# Altium PCB Dionysus.PcbDoc (part 1 of 2)
Units mil, origin at the board's own origin, x right, y up, seen from the top; angles counter-clockwise.
Board outline 4100 x 2100 mil, 4 copper layers (Component Side, Ground Plane, Power Plane, Solder Side); 123 components, 141 nets, 602 pads, 292 vias.
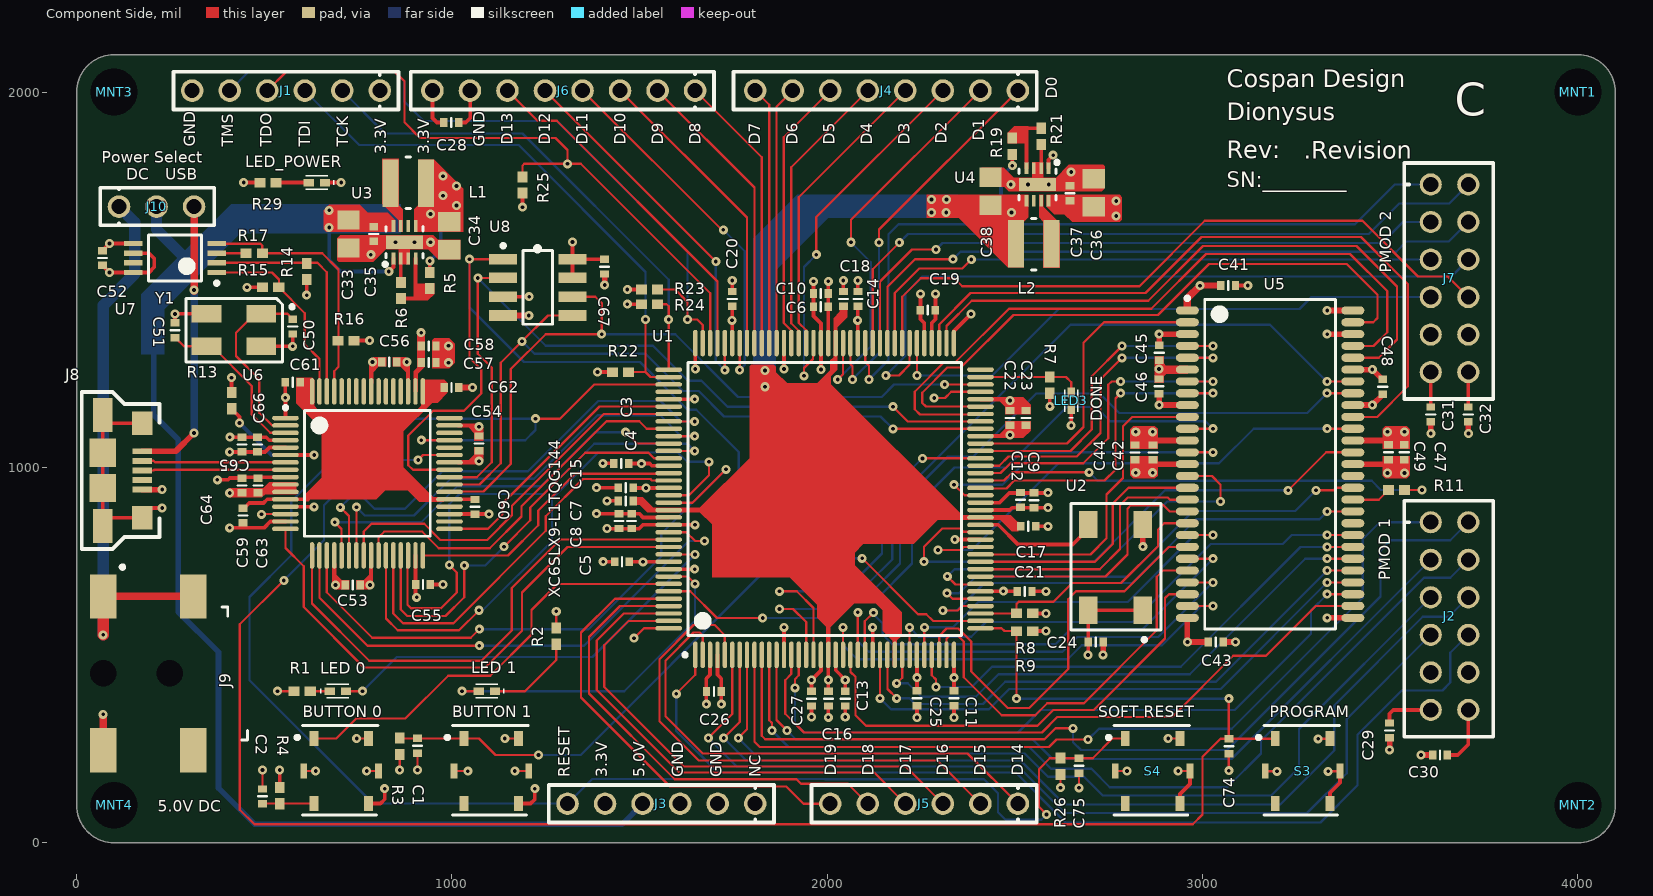
[diagram p0: Component Side view]
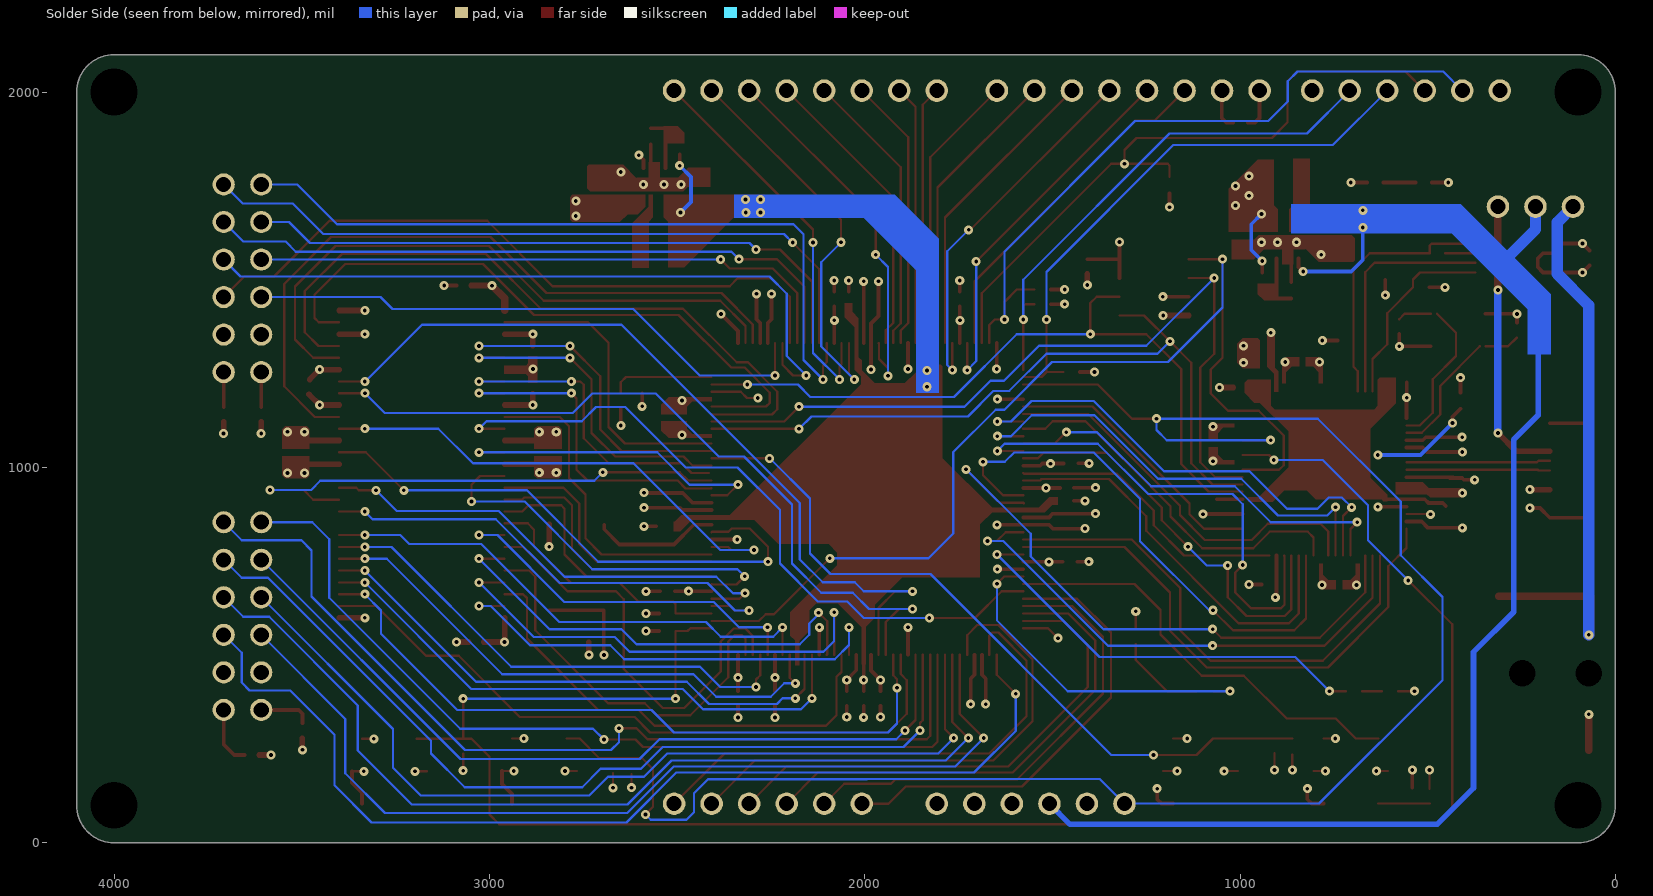
[diagram p1: Solder Side view, seen from below]
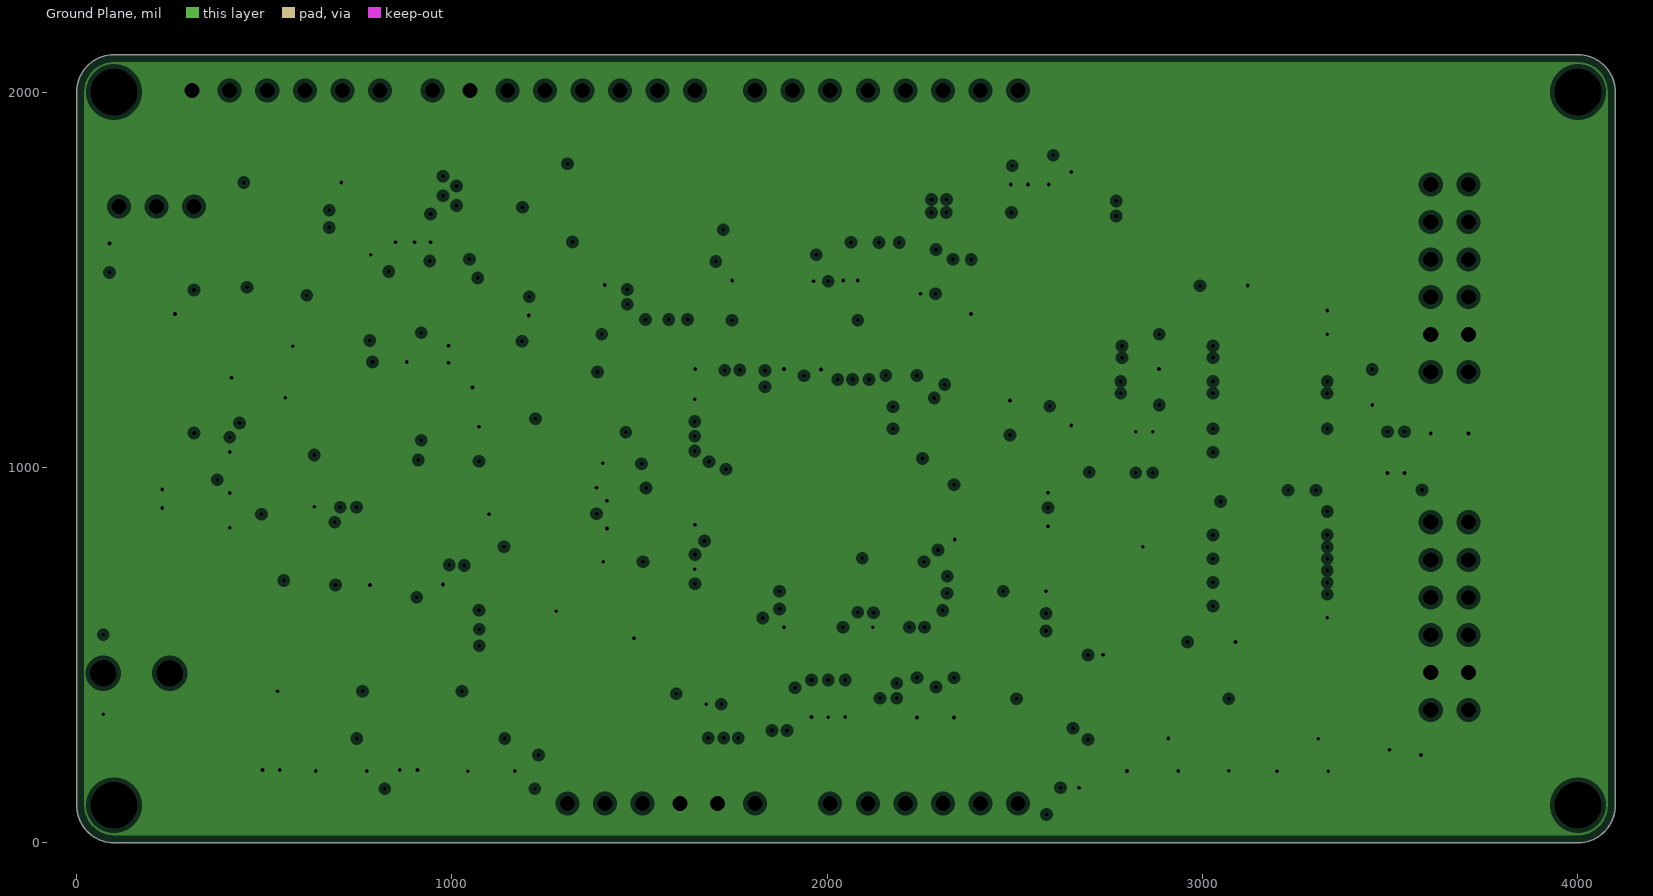
[diagram p2: Ground Plane, clearances drawn from the general rule]
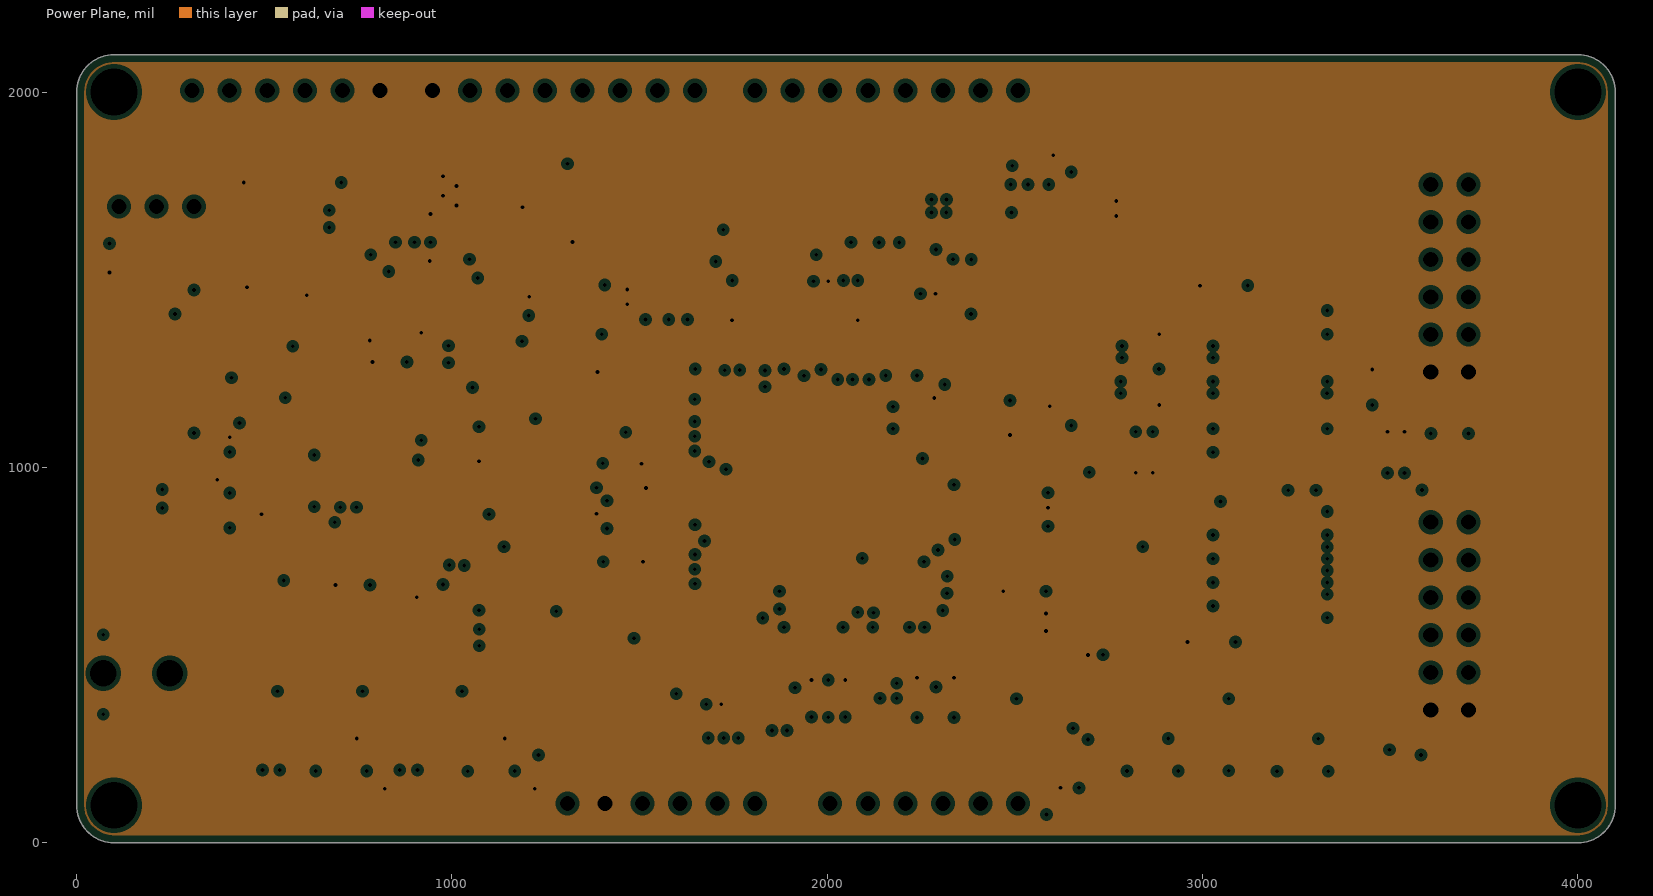
[diagram p3: Power Plane, clearances drawn from the general rule]

## Layer stack, top to bottom
Top Solder: solder mask 0.4, Solder Resist, Dk 3.5
Component Side: signal copper 1.4
Dielectric1: core 12.6, FR-4, Dk 4.8
Ground Plane: plane copper 1.4
Dielectric2: prepreg 12.6, FR-4, Dk 4.8
Power Plane: plane copper 1.4
Dielectric3: core 12.6, FR-4, Dk 4.8
Solder Side: signal copper 1.4
Bottom Solder: solder mask 0.4, Solder Resist, Dk 3.5

## Board outline
0,100 0,2000 cw(c100,2000) 100,2100 4000,2100 cw(c4000,2000) 4100,2000 4100,100 cw(c4000,100) 4000,0 100,0 cw(c100,100)

## Design rules (kind name [scope] priority, off if disabled: settings)
Clearance "Clearance~Sunstone Circuits" [All] p1: gap=6 // Sunstone Circuits Minimum Clearance Rule (MLB~4&6 Layer Designs)
DiffPairsRouting [All] p1: maxlimit=10 minlimit=10 mostfreqgap=10 toplayer_minwidth=15 toplayer_maxwidth=15 toplayer_prefwidth=15 bottomlayer_minwidth=15 bottomlayer_maxwidth=15 bottomlayer_prefwidth=15 maxuncoupledlength=500
HoleSize "HoleSize~Sunstone Circuits" [All] p1: absolutevalues=TRUE maxlimit=251 minlimit=8 maxpercent=80.000 minpercent=20.000 // Sunstone Circuits Hole Size Rule (MLB~4&6 Layer Designs)
HoleSize Testpoint [All] p2: absolutevalues=TRUE maxlimit=100 minlimit=1 maxpercent=80.000 minpercent=20.000
HoleSize TestPointUsage [All] p3: absolutevalues=TRUE maxlimit=100 minlimit=1 maxpercent=80.000 minpercent=20.000
MinimumAnnularRing "MinimumAnnularRing~Sunstone Circuits" [All] p1: minimumring=7 // Sunstone Circuits Minimum Annular Ring (MLB~4&6 Layer Designs)
MinimumSolderMaskSliver [All] p1: minsoldermaskwidth=1
PlaneClearance "PlaneClearance~Sunstone Circuits" [All] p1: clearance=12 // Sunstone Circuits Power Plane Clearance Rule (MLB~4&6 Layer Designs)
PlaneConnect "PlaneConnect~Sunstone Circuits" [All] p1: planeconnectstyle=Relief reliefexpansion=10 reliefentries=4 reliefconductorwidth=8 reliefairgap=10 // Sunstone Circuits Power Plane Connect Rule (MLB~4&6 Layer Designs)
PolygonConnect "PolygonConnect~Sunstone Circuits" [All] p1: connectstyle=Relief reliefconductorwidth=8 reliefentries=4 polygonreliefangle="90 Angle" airgapwidth=10 // Sunstone Circuits Polygon Connect Style (MLB~4&6 Layer Designs)
RoutingVias "RoutingVias~Sunstone Circuits" [All] p1: holewidth=16 width=30 viastyle="Through Hole" minholewidth=8 minwidth=24 maxholewidth=20 maxwidth=40 // Sunstone Circuits Routing Vias Rule (MLB~4&6 Layer Designs)
ShortCircuit "ShortCircuit~Sunstone Circuits" [All] p1: allowed=FALSE // Sunstone Circuits Short Circuit Rule~Do Not Allow (MLB~4&6 Layer Designs)
SilkToSilkClearance [All] p1: silktosilkclearance=5
SilkToSolderMaskClearance SilkscreenOverComponentPads [IsPad] p1: minsilkscreentomaskgap=5 clearancetoexposedcopper=TRUE
SolderMaskExpansion "SolderMaskExpansion~Sunstone Circuits" [All] p1: expansion=3 // Sunstone Circuits Solder Mask Expansion Rule (MLB~4&6 Layer Designs)
ViasUnderSMD "ViasUnderSMD~Sunstone Circuits" [All] p1: allowed=FALSE // Sunstone Circuits Vias Under SMD~Do Not Allow (MLB~4&6 Layer Designs)
Width "Width~Sunstone Circuits" [All] p1: maxlimit=100 minlimit=6 preferedwidth=10 // Sunstone Circuits Minimum Width Rule (MLB~4&6 Layer Designs)
22 further rules are at their usual default settings.

## Classes and differential pairs
differential pair USB: +USB_P -USB_N

## Components (designator, comment, footprint, x,y, rotation, side; value= is the part's Value field where it differs from the comment)
"BUTTON 0" "S_TACTILE_5X5" TACTILE_BUTTON_5X5 705,191 r0 top
"BUTTON 1" "S_TACTILE_5X5" TACTILE_BUTTON_5X5 1105,191 r0 top
C1 "0.1uF" C_ERA-0402 908.35,258.31 r90 top
C2 "0.1uF" C_ERA-0402 495,123.69 r270 top
C3 "4.7uF" C_ERA-0402 1451.09,1010.91 r0 top
C4 "0.47uF" C_ERA-0402 1463,946 r0 top
C5 "0.47uF" C_ERA-0402 1453.32,748.68 r0 top
C6 "0.47uF" C_ERA-0402 1983.04,1428.04 r0 top
C7 "4.7uF" C_ERA-0402 1479,857 r90 top
C8 "4.7uF" C_ERA-0402 1445,857 r90 top
C9 "4.7uF" C_ERA-0402 2551,912.69 r270 top
C10 "4.7uF" C_ERA-0402 1983.04,1463.04 r0 top
C11 "4.7uF" C_ERA-0402 2337.49,385 r90 top
C12 "4.7uF" C_ERA-0402 2515,913.69 r270 top
C13 "4.7uF" C_ERA-0402 2048,384 r90 top
C14 "0.47uF" C_ERA-0402 2081.58,1449 r270 top
C15 "0.47uF" C_ERA-0402 1463,911 r0 top
C16 "4.7uF" C_ERA-0402 2003,384 r90 top
C17 "4.7uF" C_ERA-0402 2535.74,843.31 r180 top
C18 "4.7uF" C_ERA-0402 2043,1449 r270 top
C19 "0.47uF" C_ERA-0402 2268,1419 r0 top
C20 "4.7uF" C_ERA-0402 1746.94,1449 r270 top
C21 "0.47uF" C_ERA-0402 2526,669.94 r180 top
C22 "0.47uF" C_ERA-0402 2487,1132 r270 top
C23 "4.7uF" C_ERA-0402 2530,1132 r270 top
C24 "0.1uF" C_ERA-0402 2715.34,534.66 r180 top
C25 "0.47uF" C_ERA-0402 2239.06,385 r90 top
C26 "0.47uF" C_ERA-0402 1698,403 r0 top
C27 "4.7uF" C_ERA-0402 1958,384 r90 top
C28 "0.1uF" C_ERA-0402 998.32,1919 r180 top
C29 "0.1uF" C_ERA-0402 3498,299.31 r90 top
C30 "0.1uF" C_ERA-0402 3632.68,234 r0 top
C31 "0.1uF" C_ERA-0402 3608,1141.31 r90 top
C32 "0.1uF" C_ERA-0402 3708,1141.31 r90 top
C33 "10uF" C_ERA-0805 724.75,1622 r90 top
C34 "22uF" C_ERA-0805 992.75,1617.4 r90 top
C35 "0.1uF" C_ERA-0402 791.75,1622 r90 top
C36 "10uF" C_ERA-0805 2710,1732 r270 top
C37 "0.1uF" C_ERA-0402 2647,1730.69 r270 top
C38 "22uF" C_ERA-0805 2435,1736 r270 top
C41 "4.7uF" C_ERA-0402 3068.2,1484.61 r180 top
C42 "0.1uF" C_ERA-0402 2867.89,1040.02 r270 top
C43 "0.1uF" C_ERA-0402 3035.02,534.73 r180 top
C44 "0.1uF" C_ERA-0402 2819.76,1040.02 r270 top
C45 "0.1uF" C_ERA-0402 2884.54,1305.6 r90 top
C46 "0.1uF" C_ERA-0402 2884.4,1216.02 r270 top
C47 "0.1uF" C_ERA-0402 3537.31,1040.43 r90 top
C48 "0.1uF" C_ERA-0402 3480,1215 r90 top
C49 "4.7uF" C_ERA-0402 3495.07,1040.43 r90 top
C50 "22pF" C_ERA-0402 576,1375.31 r90 top
C51 "22pF" C_ERA-0402 262,1365.68 r270 top
C52 "0.1uF" C_ERA-0402 69,1558 r270 top
C53 "0.1uF" C_ERA-0402 736,687 r180 top
C54 "0.1uF" C_ERA-0402 1072,1064 r270 top
C55 "0.1uF" C_ERA-0402 923,688 r180 top
C56 "0.1uF" C_ERA-0402 833,1281 r180 top
C57 "0.1uF" C_ERA-0402 938,1280 r180 top
C58 "4.7uF" C_ERA-0402 938,1324 r180 top
C59 "0.1uF" C_ERA-0402 443,872 r90 top
C60 "0.1uF" C_ERA-0402 1062,895 r90 top
C61 "0.1uF" C_ERA-0402 576,1227 r0 top
C62 "4.7uF" C_ERA-0402 999,1213 r180 top
C63 "4.7uF" C_ERA-0402 483,952 r90 top
C64 "0.1uF" C_ERA-0402 441,952 r90 top
C65 "4.7uF" C_ERA-0402 441,1061 r90 top
C66 "0.1uF" C_ERA-0402 482,1061 r90 top
C67 "4.7uF" C_ERA-0402 1407,1535 r90 top
C74 "0.1uF" C_ERA-0402 3070,257.31 r90 top
C75 "0.1uF" C_ERA-0402 2670.77,205.26 r90 top
J1 "J_HDR1X6_THRHOLE_VERT" HDR_1X6 808,2004 r180 top
J2 "PMOD" PMOD 3608,854 r270 top locked
J3 "J_HDR1X6_THRHOLE_VERT_FEMALE" "HDR_1X6 - FEMALE" 1808,104 r180 top
J4 "J_HDR1X8_THRHOLE_VERT_RECPT" "HDR_1X8 - FEMALE" 2508,2004 r180 top locked
J5 "J_HDR1X6_THRHOLE_VERT_FEMALE" "HDR_1X6 - FEMALE" 2508,104 r180 top locked
J6 "J_HDR1X8_THRHOLE_VERT_RECPT" "HDR_1X8 - FEMALE" 1648,2004 r180 top locked
J7 "PMOD" PMOD 3608,1754 r270 top locked
J8 "USB Mini Receptical" MICRO_USB_RECEPTICAL 175,992 r0 top
J9 "Barrel Jack" PJ-002BH-SMT 191.08,451.47 r0 top
J10 "J_HDR1X3_JUMPER_SELECT" HDR_1X3 113,1695 r0 top
L1 "1.0uH" INDNRH1212 883.75,1757 r0 top
L2 "1.0uH" INDNRH1212 2550,1596 r180 top
LED3 "LED_GRN_0402" DIOM1005X07L_GREEN 2650,1178 r90 top
"LED 0" "LED_BLUE_0402" DIOM1005X07L_BLUE 696,404 r0 top
"LED 1" "LED_YLW_0402" DIOM1005X07L_YELLOW 1093,404 r180 top
LED_POWER "LED_ORN_0402" DIOM1005X07L_ORANGE 640,1759 r180 top
MNT1 "Mounting Hole" MNT_4-40#1 3700,2000 r90 top
MNT2 "Mounting Hole" MNT_4-40#1 3700,100 r90 top
MNT3 "Mounting Hole" MNT_4-40#2 108,2004 r90 top
MNT4 "Mounting Hole" MNT_4-40#2 108,104 r90 top
R1 "1.0k Ohms" ERA-0402 601,404 r180 top
R2 "1.0k Ohms" ERA-0402 1278,550.65 r90 top
R3 "R_0402_10.0K" ERA-0402 861,257 r90 top
R4 "R_0402_10.0K" ERA-0402 541,125.65 r270 top
R5 "R_0402_249K" ERA-0402 941,1498 r270 top
R6 "R_0402_39.2K" ERA-0402 864.35,1471.65 r90 top
R7 "1.0k Ohms" ERA-0402 2593,1219.35 r90 top
R8 "4.7k Ohms" ERA-0402 2526,611 r180 top
R9 "4.7k Ohms" ERA-0402 2526,564 r180 top
R11 "R_0402_33" ERA-0402 3516.65,940 r0 top
R13 "R_0402_12.0K" ERA-0402 413,1178 r90 top
R14 "R_0402_10.0K" ERA-0402 613,1522 r90 top
R15 "R_0402_10.0K" ERA-0402 517,1480 r0 top
R16 "R_0402_10.0K" ERA-0402 718,1338 r180 top
R17 "2.2k Ohms" ERA-0402 473.22,1570.8 r180 top
R19 "R_0402_64.9K" ERA-0402 2493,1856 r90 top
R21 "R_0402_39.2K" ERA-0402 2570,1882 r270 top
R22 "R_0402_10.0K" ERA-0402 1449,1254 r0 top
R23 "R_0402_10.0K" ERA-0402 1526.35,1474 r0 top
R24 "R_0402_10.0K" ERA-0402 1526.35,1435 r0 top
R25 "R_0402_10.0K" ERA-0402 1188,1752.35 r90 top
R26 "R_0402_10.0K" ERA-0402 2621.43,203.88 r90 top
R29 "1.0k Ohms" ERA-0402 510,1759 r0 top
S3 "S_TACTILE_5X5" TACTILE_BUTTON_5X5 3266.61,191 r0 top
S4 "S_TACTILE_5X5" TACTILE_BUTTON_5X5 2867,191 r0 top
U1 "XC6SLX9-3TQG144C" TQG144_N 1993,916 r90 top locked
U2 "OSC 50.000 MHZ SMD" SMD_OSC_12MHZ 2768,734 r90 top
U3 "TPS62080" QFN50P200X200X80-8L 873.75,1600 r0 top
U4 "TPS62080" QFN50P200X200X80-8L 2560.25,1754 r180 top
U5 "64MBits SDRAM" TSOP80P1180X120-54N 3180.05,1008.73 r0 top
U6 "U_FT2232H-LQFP64" LQFP-64_N 775,984 r0 top locked
U7 "EEPROM" TSOP65P640X120-8L 262,1558 r180 top
U8 "U_16MBIT_SPI_FLASH" SOIC127P600X135-8L 1229,1480 r0 top
Y1 "12.00MHz Crystal" LCCS220P500X320X105-4L 419,1366 r180 top

## Footprints (in the part's own frame and the unit in brackets; to place one, negate y for a bottom-side part, rotate by r counter-clockwise, add the part's x,y. Pads: shape width x height; smd on the part's side, far side on the other; paste and mask are expansions set on the pad)
C_ERA-0402 [mm]
  rect 0.5x0.6 smd: 1(-0.5,0) 2(0.5,0)
  silkscreen extent 0,-0.3 0,0.3, body extent -0.51,-0.3 0.51,0.3, height 0.2
C_ERA-0805 [mm]
  rect 1.3x1.5 smd: 1(-0.95,0) 2(0.95,0)
  body extent -0.94,-0.62 1.06,0.63, height 0.78
DIOM1005X07L_BLUE [mm] "Molded Diode, 2-Leads, Body 1.0x0.5mm, IPC High Density"
  rect 0.7x0.5 smd: 1(0.55,0) 2(-0.55,0)
  silkscreen extent -1.15,-0.45 0.75,0.45, body extent -0.5,-0.25 0.51,0.25, height 0.45
DIOM1005X07L_GREEN [mm] "Molded Diode, 2-Leads, Body 1.0x0.5mm, IPC High Density"
  rect 0.7x0.5 smd: 1(0.55,0) 2(-0.55,0)
  silkscreen extent -1.15,-0.45 0.75,0.45, body extent -0.5,-0.25 0.51,0.25, height 0.45
DIOM1005X07L_ORANGE [mm] "Molded Diode, 2-Leads, Body 1.0x0.5mm, IPC High Density"
  rect 0.7x0.5 smd: 1(0.55,0) 2(-0.55,0)
  silkscreen extent -1.15,-0.45 0.75,0.45, body extent -0.5,-0.25 0.51,0.25, height 0.45
DIOM1005X07L_YELLOW [mm] "Molded Diode, 2-Leads, Body 1.0x0.5mm, IPC High Density"
  rect 0.7x0.5 smd: 1(0.55,0) 2(-0.55,0)
  silkscreen extent -1.15,-0.45 0.75,0.45, body extent -0.5,-0.25 0.51,0.25, height 0.45
ERA-0402 [mm] "Chip Resistor, 2-Leads, Body 1.0x0.5mm, IPC Medium Density"
  rect 0.75x0.65 smd: 1(-0.55,0) 2(0.55,0)
  body extent -0.5,-0.25 0.5,0.25, height 0.33
HDR_1X3 [mil] "HEADER"
  round 60 hole 40: 1(0,0) 2(100,0) 3(200,0)
  silkscreen extent -50,-50 254,50, body extent -51,-48 245,50, height 329
HDR_1X6 [mil] "HEADER"
  round 60 hole 40: 1(0,0) 2(100,0) 3(200,0) 4(300,0) 5(400,0) 6(500,0)
  silkscreen extent -50,-50 550,50, body extent -50,-50 550,50, height 334
"HDR_1X6 - FEMALE" [mil] "HEADER"
  round 60 hole 40: 1(0,0) 2(100,0) 3(200,0) 4(300,0) 5(400,0) 6(500,0)
  silkscreen extent -50,-50 550,50, body extent -56,-48 554,50, height 340
"HDR_1X8 - FEMALE" [mil] "FEMALE HEADER"
  round 60 hole 40: 1(0,0) 2(100,0) 3(200,0) 4(300,0) 5(400,0) 6(500,0) 7(600,0) 8(700,0)
  silkscreen extent -50,-50 758,50, body extent -54,-49 756,49, height 340
INDNRH1212 [mm] "WIREWOUND INDUCTOR 3.0X3.0X1.1mm"
  rect 1.1x3.2 smd: 1(-1.2,0) 2(1.2,0)
  silkscreen extent -0.15,-1.7 0.15,1.78, body extent -1.9,-1.55 1.92,1.6, height 1.1
LCCS220P500X320X105-4L [mm] "LCC, 4-Pins, Body 5.0x3.3mm (max), Pitch 2.20mm, IPC High Density"
  rect 2x1.2 smd: 1(-1.85,-1.1) 2(1.85,-1.1) 3(1.85,1.1) 4(-1.85,1.1)
  silkscreen extent -4.06,-2.15 3.22,2.15, body extent -2.5,-1.6 2.5,1.6, height 1.05
LQFP-64_N [mm] "Thin QFP, 64-Leads, Body 10x10mm, Pitch 0.5mm, IPC Medium Density"
  oval 1.8x0.3 smd: 1(-5.55,3.75) 2(-5.55,3.25) 3(-5.55,2.75) 4(-5.55,2.25) 5(-5.55,1.75) 6(-5.55,1.25) 7(-5.55,0.75) 8(-5.55,0.25) 9(-5.55,-0.25) 10(-5.55,-0.75) 11(-5.55,-1.25) 12(-5.55,-1.75) 13(-5.55,-2.25) 14(-5.55,-2.75) 15(-5.55,-3.25) 16(-5.55,-3.75) 33(5.55,-3.75) 34(5.55,-3.25) 35(5.55,-2.75) 36(5.55,-2.25) 37(5.55,-1.75) 38(5.55,-1.25) 39(5.55,-0.75) 40(5.55,-0.25) 41(5.55,0.25) 42(5.55,0.75) 43(5.55,1.25) 44(5.55,1.75) 45(5.55,2.25) 46(5.55,2.75) 47(5.55,3.25) 48(5.55,3.75)
  oval 0.3x1.8 smd: 17(-3.75,-5.55) 18(-3.25,-5.55) 19(-2.75,-5.55) 20(-2.25,-5.55) 21(-1.75,-5.55) 22(-1.25,-5.55) 23(-0.75,-5.55) 24(-0.25,-5.55) 25(0.25,-5.55) 26(0.75,-5.55) 27(1.25,-5.55) 28(1.75,-5.55) 29(2.25,-5.55) 30(2.75,-5.55) 31(3.25,-5.55) 32(3.75,-5.55) 49(3.75,5.55) 50(3.25,5.55) 51(2.75,5.55) 52(2.25,5.55) 53(1.75,5.55) 54(1.25,5.55) 55(0.75,5.55) 56(0.25,5.55) 57(-0.25,5.55) 58(-0.75,5.55) 59(-1.25,5.55) 60(-1.75,5.55) 61(-2.25,5.55) 62(-2.75,5.55) 63(-3.25,5.55) 64(-3.75,5.55)
  silkscreen extent -5.67,-4.25 4.25,4.57, body extent -5,-5 5,5, height 1.6
MICRO_USB_RECEPTICAL [mm] "MICRO USB, R/A, SMT, AB TYPE"
  rect 1.35x0.4 smd: 1(0,1.3) 2(0,0.65) 3(0,0) 4(0,-0.65) 5(0,-1.3)
  rect 1.3x2.3 smd: S(-2.675,-3.75) S(-2.675,3.75)
  rect 1.8x1.9 smd: S(-2.675,-1.2) S(-2.675,1.2)
  rect 1.4x1.6 smd: S(0,-3.2) S(0,3.2)
  silkscreen extent -4.1,-5.31 1.16,5.31, body extent -5.37,-4.4 0.23,4.4, height 2.77
MNT_4-40#1 [mil]
  round 0 hole 125 mask+1.5: MOUNT(0,-300)
MNT_4-40#2 [mil]
  round 0 hole 125 mask+1.5: MOUNT(-4,8)
PJ-002BH-SMT [mm] "CUI-Barrel Jack ID=2.5mm, OD=5.5mm"
  rect 1.8x3 smd: 1(-3.05,5.2) 1(3.05,5.2) 2(-3.05,-5.2) 3(3.05,-5.2)
  round 1 hole 1.778 unplated: ""(-3.05,0) ""(1.45,0)
  silkscreen extent -1.88,-4.5 6.73,7.31, body extent -8.05,-6.33 6.75,6.27, height 11.2
PMOD [mm] "PMOD Connector"
  round 1.5 hole 1.016: 1(0,0) 2(2.54,0) 3(5.08,0) 4(7.62,0) 5(10.16,0) 6(12.7,0) 7(0,2.54) 8(2.54,2.54) 9(5.08,2.54) 10(7.62,2.54) 11(10.16,2.54) 12(12.7,2.54)
  silkscreen extent -1.45,-1.8 14.53,4.23, body extent -1.57,-0.25 14.17,12.64, height 5.02
QFN50P200X200X80-8L [mm] "QFN, 8-Leads, Body 2.1x2.1mm (max), Pitch 0.50mm, IPC High Density"
  rect 0.25x0.8 smd mask+0.07: 1(-0.75,-1.1) 2(-0.25,-1.1) 3(0.25,-1.1) 4(0.75,-1.1) 5(0.75,1.1) 6(0.25,1.1) 7(-0.25,1.1) 8(-0.75,1.1)
  rect 2.5x0.9 smd mask+0.07: 9(0,0)
  silkscreen extent -1.44,-1.61 1.26,1.06, body extent -1.05,-1.05 1.05,1.05, height 0.8
SMD_OSC_12MHZ [mm] "LCC, 4-Pins, Body 7.2x5.2mm (max), Pitch 3.70mm, IPC Medium Density"
  rect 1.85x1.25 smd: 1(-2.9,-1.85) 2(2.9,-1.85) 3(2.9,1.85) 4(-2.9,1.85)
  silkscreen extent -5.02,-3.08 4.33,3.03, body extent -3.5,-2.5 3.5,2.5, height 1.7
SOIC127P600X135-8L [mm] "SOIC, 8-Leads, Body 5.0x4.0mm (max), Pitch 1.27mm, IPC High Density"
  rect 1.9x0.72 smd: 1(-2.35,1.905) 2(-2.35,0.635) 3(-2.35,-0.635) 4(-2.35,-1.905) 5(2.35,-1.905) 6(2.35,-0.635) 7(2.35,0.635) 8(2.35,1.905)
  silkscreen extent -2.47,-2.5 1,2.94, body extent -2,-2.5 2,2.5, height 1.35
TACTILE_BUTTON_5X5 [mm] "LCC, 8-Pins, Body 6.5x6.0mm (max), Pitch 1.27mm, IPC Medium Density"
  rect 0.6x1 smd: 1(-1.85,2.2) 2(-1.85,-2.2) 3(1.85,-2.2) 4(1.85,2.2)
  rect 0.45x1 smd: 5(-2.525,0) 6(2.525,0)
  silkscreen extent -3.1,-2.98 2.5,3.08, body extent -2.47,-2.52 2.42,2.47, height 1.5
TQG144_N [mm] "Thin QFP, 144-Leads, Body 20x20mm, Pitch 0.5mm, IPC Medium Density"
  oval 1.8x0.3 smd: 1(-10.55,8.75) 2(-10.55,8.25) 3(-10.55,7.75) 4(-10.55,7.25) 5(-10.55,6.75) 6(-10.55,6.25) 7(-10.55,5.75) 8(-10.55,5.25) 9(-10.55,4.75) 10(-10.55,4.25) 11(-10.55,3.75) 12(-10.55,3.25) 13(-10.55,2.75) 14(-10.55,2.25) 15(-10.55,1.75) 16(-10.55,1.25) 17(-10.55,0.75) 18(-10.55,0.25) 19(-10.55,-0.25) 20(-10.55,-0.75) 21(-10.55,-1.25) 22(-10.55,-1.75) 23(-10.55,-2.25) 24(-10.55,-2.75) 25(-10.55,-3.25) 26(-10.55,-3.75) 27(-10.55,-4.25) 28(-10.55,-4.75) 29(-10.55,-5.25) 30(-10.55,-5.75) 31(-10.55,-6.25) 32(-10.55,-6.75) 33(-10.55,-7.25) 34(-10.55,-7.75) 35(-10.55,-8.25) 36(-10.55,-8.75) 73(10.55,-8.75) 74(10.55,-8.25) 75(10.55,-7.75) 76(10.55,-7.25) 77(10.55,-6.75) 78(10.55,-6.25) 79(10.55,-5.75) 80(10.55,-5.25) 81(10.55,-4.75) 82(10.55,-4.25) 83(10.55,-3.75) 84(10.55,-3.25) 85(10.55,-2.75) 86(10.55,-2.25) 87(10.55,-1.75) 88(10.55,-1.25) 89(10.55,-0.75) 90(10.55,-0.25) 91(10.55,0.25) 92(10.55,0.75) 93(10.55,1.25) 94(10.55,1.75) 95(10.55,2.25) 96(10.55,2.75) 97(10.55,3.25) 98(10.55,3.75) 99(10.55,4.25) 100(10.55,4.75) 101(10.55,5.25) 102(10.55,5.75) 103(10.55,6.25) 104(10.55,6.75) 105(10.55,7.25) 106(10.55,7.75) 107(10.55,8.25) 108(10.55,8.75)
  oval 0.3x1.8 smd: 37(-8.75,-10.55) 38(-8.25,-10.55) 39(-7.75,-10.55) 40(-7.25,-10.55) 41(-6.75,-10.55) 42(-6.25,-10.55) 43(-5.75,-10.55) 44(-5.25,-10.55) 45(-4.75,-10.55) 46(-4.25,-10.55) 47(-3.75,-10.55) 48(-3.25,-10.55) 49(-2.75,-10.55) 50(-2.25,-10.55) 51(-1.75,-10.55) 52(-1.25,-10.55) 53(-0.75,-10.55) 54(-0.25,-10.55) 55(0.25,-10.55) 56(0.75,-10.55) 57(1.25,-10.55) 58(1.75,-10.55) 59(2.25,-10.55) 60(2.75,-10.55) 61(3.25,-10.55) 62(3.75,-10.55) 63(4.25,-10.55) 64(4.75,-10.55) 65(5.25,-10.55) 66(5.75,-10.55) 67(6.25,-10.55) 68(6.75,-10.55) 69(7.25,-10.55) 70(7.75,-10.55) 71(8.25,-10.55) 72(8.75,-10.55) 109(8.75,10.55) 110(8.25,10.55) 111(7.75,10.55) 112(7.25,10.55) 113(6.75,10.55) 114(6.25,10.55) 115(5.75,10.55) 116(5.25,10.55) 117(4.75,10.55) 118(4.25,10.55) 119(3.75,10.55) 120(3.25,10.55) 121(2.75,10.55) 122(2.25,10.55) 123(1.75,10.55) 124(1.25,10.55) 125(0.75,10.55) 126(0.25,10.55) 127(-0.25,10.55) 128(-0.75,10.55) 129(-1.25,10.55) 130(-1.75,10.55) 131(-2.25,10.55) 132(-2.75,10.55) 133(-3.25,10.55) 134(-3.75,10.55) 135(-4.25,10.55) 136(-4.75,10.55) 137(-5.25,10.55) 138(-5.75,10.55) 139(-6.25,10.55) 140(-6.75,10.55) 141(-7.25,10.55) 142(-7.75,10.55) 143(-8.25,10.55) 144(-8.75,10.55)
  silkscreen extent -10.67,-9.25 9.25,9.57, body extent -10,-10 10,10, height 1.6
TSOP65P640X120-8L [mm] "TSOP, 8-Leads, Body 3.1x4.5mm (max), Pitch 0.65mm, IPC High Density"
  rect 1.25x0.35 smd: 1(-2.825,0.975) 2(-2.825,0.325) 3(-2.825,-0.325) 4(-2.825,-0.975) 5(2.825,-0.975) 6(2.825,-0.325) 7(2.825,0.325) 8(2.825,0.975)
  silkscreen extent -2.95,-1.55 1.8,1.82, body extent -2.25,-1.55 2.25,1.55, height 1.2
TSOP80P1180X120-54N [mm] "TSOP, 54-Leads, Body 22.3x10.2mm (max), Pitch 0.80mm, IPC Medium Density"
  oval 1.55x0.55 smd: 1(-5.6,10.4) 2(-5.6,9.6) 3(-5.6,8.8) 4(-5.6,8) 5(-5.6,7.2) 6(-5.6,6.4) 7(-5.6,5.6) 8(-5.6,4.8) 9(-5.6,4) 10(-5.6,3.2) 11(-5.6,2.4) 12(-5.6,1.6) 13(-5.6,0.8) 14(-5.6,0) 15(-5.6,-0.8) 16(-5.6,-1.6) 17(-5.6,-2.4) 18(-5.6,-3.2) 19(-5.6,-4) 20(-5.6,-4.8) 21(-5.6,-5.6) 22(-5.6,-6.4) 23(-5.6,-7.2) 24(-5.6,-8) 25(-5.6,-8.8) 26(-5.6,-9.6) 27(-5.6,-10.4) 28(5.6,-10.4) 29(5.6,-9.6) 30(5.6,-8.8) 31(5.6,-8) 32(5.6,-7.2) 33(5.6,-6.4) 34(5.6,-5.6) 35(5.6,-4.8) 36(5.6,-4) 37(5.6,-3.2) 38(5.6,-2.4) 39(5.6,-1.6) 40(5.6,-0.8) 41(5.6,0) 42(5.6,0.8) 43(5.6,1.6) 44(5.6,2.4) 45(5.6,3.2) 46(5.6,4) 47(5.6,4.8) 48(5.6,5.6) 49(5.6,6.4) 50(5.6,7.2) 51(5.6,8) 52(5.6,8.8) 53(5.6,9.6) 54(5.6,10.4)
  silkscreen extent -5.72,-11.15 4.43,11.35, body extent -5.12,-11.15 5.12,11.15, height 1.2

## Part data
"BUTTON 0" "BUTTON 1" S3 S4: "SWITCH LT 1.5MM HT 160GF SMD"
C1 C2 C24 C28 C29 C30 C31 C32 C35 C37 C42 C43 C44 C45 C46 C47 C48 C52 C53 C54 C55 C56 C57 C59 C60 C61 C64 C66 C74 C75: library part C_0402_0.1UF_16V, "CAP CER .10UF 16V X7R 0402"
C3 C7 C8 C9 C10 C11 C12 C13 C16 C17 C18 C20 C23 C27 C41 C49 C58 C62 C63 C65 C67: library part C_0402_4.7UF, "CAP CER 4.7UF 6.3V X5R 0402"
C4 C5 C6 C14 C15 C19 C21 C22 C25 C26: library part C_0402_0.47UF, "CAP CER .47UF 16V X5R 0402"
C33 C36: library part C_0805_10UF_6.3V, "CAP CER 10UF 6.3V X7R 10% 0805"
C34 C38: library part C_0805_22UF_6.3V, "CAP CER 22UF 6.3V X7R 10% 0805"
C50 C51: library part C_0402_22PF_50V, "CAP CER 22PF 50V NP0 0402"
J1: "CONN HEADER .100\" 12POS TIN PCB"
J2 J7: library part J_PMOD, "CONN FEMALE 12POS DL .1\" R/A TIN"
J3 J5: "CONN HEADER FEMALE 6POS .1\" TIN"
J4 J6: library part J_HDR1X8_THRHOLE_VERT_FEMALE, "CONN HEADER FEMALE 8POS .1\" TIN"
J8: library part J_USB_MICRO_AB, "CONN RCPT MICRO USB TYPE AB"
J9: library part J_BARREL_JACK_2.1, "CONN POWER JACK 2.1X5.5MM SMD"
J10: "CONN HEADER .100\" 3POS TIN PCB"
L1 L2: library part L_1.0UH_1.62A, "INDUCTOR POWER 1.0UH 1620MA 1212"
LED3: "LED 1X0.5MM 570NM GN WTR CLR SMD"
"LED 0": "LED 1X0.5MM 470NM BL WTR CLR SMD"
"LED 1": "LED 1X0.5MM 590NM YW WTR CLR SMD"
LED_POWER: "LED 1X0.5MM 601NM ORN WTRCLR SMD"
MNT1 MNT2 MNT3 MNT4: library part MNT_440_HOLE
R1 R2 R7 R29: library part R_0402_1.0K, "RES 1.00K OHM 1/16W 1% 0402 SMD"
R3 R4 R14 R15 R16 R22 R23 R24 R25 R26: "RES 10.0K OHM 1/16W 1% 0402 SMD"
R5: "RES 249K OHM 1/16W 1% 0402 SMD"
R6 R21: "RES 39.2K OHM 1/16W 1% 0402 SMD"
R8 R9: library part R_0402_4.70K, "RES 4.70K OHM 1/10W 1% 0402 SMD"
R11: "RES 33.0 OHM 1/16W 1% 0402 SMD"
R13: "RES 12.0K OHM 1/16W 1% 0402 SMD"
R17: library part R_0402_2.2K, "RES 2.20K OHM 1/10W 1% 0402 SMD"
R19: "RES 64.9K OHM 1/16W 1% 0402 SMD"
U1: library part U_XC6SLX9-3TQG144C, "IC FPAG SPARTAN 6 9K 144TQFP"
U2: library part U_OSC_50MHZ_SMD, "OSC 50.0000 MHZ 3.3V SMD"
U3 U4: library part U_TPS62080, "IC BUCK SYNC ADJ 1.2A 8WSON"
U5: library part U_MT48LC4M16A2P, "IC SDRAM 64MBIT 133MHZ 54TSOP"
U6: "IC USB HS DUAL UART/FIFO 64-LQFP"
U7: library part U_EEPROM_M93C46-WDW6TP, "IC EEPROM 1KBIT 2MHZ 8TSSO"
U8: "IC FLASH 16MBIT 75MHZ 8SOIC"
Y1: library part Y_SMD_12.00MHZ_18PF, "CRYSTAL 12.000 MHZ 18PF SMD"

## Via types
v1: diameter 24, hole 10, Component Side to Solder Side, 288 vias
v2: diameter 24, hole 10, Component Side to Solder Side, tented top, 4 vias

## Nets (pads, with @x,y where several pads share a name; then routed paths per layer and width w, separated by ;. In a path a pad name is that pad's centre, name@x,y a point inside that pad or via, vN(x,y) a via of type N, cw(c..) or ccw(c..) an arc to the next point about the centre after c; other vN are vias at no path point)
A0: U1.35 U5.23 | length 1076
  Component Side w6: U1.35@2317.8,500.65 2317.8,543.8 2327,553 2347,553 2364,536 2364,441 2465,340 2554,340 2586,372 2684,372 2878,566 2878,709 2894.27,725.27 U5.23@2959.57,725.27
A1: U1.23 U5.24 | length 1293.1
  Component Side w6: U1.23@2081.58,500.65 v1(2081.58,614) ; U5.24@2959.57,693.77 v1(3027.91,693.77)
  Solder Side w6: v1(2081.58,614) 2082,613.58 2082,537 2110,509 2627,509 2666,548 2881.69,548 3027.69,694 v1(3027.91,693.77)
A2: U1.22 U5.25 | length 1270.6
  Component Side w6: U1.22@2061.9,500.65 2061.9,455.1 2075,442 2075,340 2103,312 2560,312 2602,354 2710,354 2900,544 2900,652 2910.28,662.28 U5.25@2959.57,662.28
A3: U1.21 U5.26 | length 1245.7
  Component Side w6: U1.21@2042.21,500.65 v1@2042.21,572.38 ; U5.26@2959.57,630.78 v1(3027.91,630.78)
  Solder Side w6: v1@2042.21,572.38 2042.21,526.79 2080,489 2641,489 2678,526 2892,526 2996.78,630.78 v1(3027.91,630.78)
  other v1: 2042,574
A4: U1.14 U5.29 | length 1836.2
  Component Side w6: U1.14@1904.42,500.65 1904.42,449.42 1888,433 1888,344 1938,294 2572,294 2613,335 2919,335 3082,498 3169,498 3301.78,630.78 U5.29@3400.52,630.78
A5: U1.15 U5.30 | length 1872.2
  Component Side w6: v1(1914,413) 1914,436 1924.1,446.1 U1.15@1924.1,500.65 ; v1(3332.18,662.28) U5.30@3400.52,662.28
  Solder Side w6: v1(1914,413) 1914,318 1938,294 2508,294 2568,354 3086,354 3289,557 3289,619.09 v1(3332.18,662.28)
A6: U1.26 U5.31 | length 1527.4
  Component Side w6: v1(2140.64,385) U1.26@2140.64,500.65 ; v1(3332.18,693.77) U5.31@3400.52,693.77
  Solder Side w6: v1(2140.64,385) 2169.64,356 2431,356 2485,410 3048.41,410 v1(3332.18,693.77)
A7: U1.27 U5.32 | length 1494.8
  Component Side w6: U1.27@2160.32,500.65 2160.32,409.68 v1(2185,385) ; v1(3332.18,725.27) U5.32@3400.52,725.27
  Solder Side w6: v1(2185,385) 2219,385 2234,370 2415,370 2474,429 3035.91,429 v1(3332.18,725.27)
A8: U1.29 U5.33 | length 1464.5
  Component Side w6: v1(2185,425) 2199.69,439.69 U1.29@2199.69,500.65 ; v1(3332.18,756.76) U5.33@3400.52,756.76
  Solder Side w6: v1(2185,425) 2214.6,425 2250.6,389 2396,389 2456,449 2966,449 3273.76,756.76 v1(3332.18,756.76)
A9: U1.33 U5.34 | length 1355.6
  Component Side w6: U1.33@2278.43,500.65 2278.43,446.57 2290,435 v1(2290,415) ; v1(3332.18,788.26) U5.34@3400.52,788.26
  Solder Side w6: v1(2290,415) 2385,415 2439,469 2942,469 3261.26,788.26 v1(3332.18,788.26)
A10: U1.24 U5.22 | length 1244.8
  Component Side w6: U1.24@2101.27,500.65 2099.95,501.96 2099.95,589.95 v1(2123,613) ; U5.22@2959.57,756.76 v1(3027.91,756.76)
  Solder Side w6: v1(2123,613) 2123,608.94 2148,583.94 2148,554 2173,529 2608,529 2648,569 2840.15,569 v1(3027.91,756.76)
A11: U1.30 U5.35 | length 1377.5
  Component Side w6: v1(2219,574) 2219,573.81 2219.38,573.43 U1.30@2219.38,500.65 ; v1(3332.18,819.76) U5.35@3400.52,819.76
  Solder Side w6: v1(2219,574) 2244,549 2384,549 2423,588 2814,588 3022,796 3214,796 3237.76,819.76 v1(3332.18,819.76)
BA0: U1.32 U5.20 | length 1012.4
  Component Side w6: U1.32@2258.75,500.65 v1@2258.75,574 ; U5.20@2959.57,819.76 v1(3027.91,819.76)
  Solder Side w6: v1(2259,574) 2335,574 2402.5,641.5 2800.5,641.5 2978.76,819.76 v1(3027.91,819.76)
BA1: U1.34 U5.21 | length 1141.6
  Component Side w6: U1.34@2298.12,500.65 2298.12,551.12 2318,571 2349,571 2384,536 2384,456 2481,359 2538,359 2642,463 2642,649 2663,670 2792,670 2910.26,788.26 U5.21@2959.57,788.26
BUTTON0: "BUTTON 1.1" C1.2 R3.2 U1.60 | length 1977.9
  Component Side w6: R3.2@861,278 C1.2@908.35,278 ; C1.2@908.35,277.61 1032.17,277.61 1072.39,277.61 1116,234 v1(1231,234) ; v1@2254,1024.27 U1.60@2408.35,1024.27
  Solder Side w6: v1(1231,234) 1343,234 1825,716 2091,716 2146,771 2146,917 v1@2253.5,1024.5
  other v1: 2254,1024
BUTTON1: "BUTTON 0.1" U1.138 | length 1154.2
  Component Side w6: 632.17,277.61 691.61,277.61 745,331 876,331 990,445 1102,445 1212,555 1212,620 1281.62,689.62 U1.138@1577.65,689.62
C\A\S\: U1.45 U5.17 | length 700.9
  Component Side w6: U1.45@2408.35,728.99 2725.99,728.99 2780,783 2780,899 2801,920 2907,920 2913,914 2959.33,914 U5.17@2959.57,914.24
C\S\: R8.2 U1.39 U5.19 | length 691.2
  Component Side w6: U1.39@2408.47,611 R8.2@2504.35,611 2504.35,636.35 2510,642 2603,642 2653,692 2783,692 2881,790 2881,834 2898.25,851.25 U5.19@2959.57,851.25
CKE: U1.40 U5.37 | length 1307.3
  Component Side w6: v1(2308,618.57) 2347.57,618.57 2359.57,630.57 U1.40@2408.35,630.57 ; v1(3332.18,882.75) U5.37@3400.52,882.75
  Solder Side w6: v1(2308,618.57) 2345.57,618.57 2419,692 2813,692 2983,862 3311.43,862 v1(3332.18,882.75)
CLK: R11.2 U1.57 | length 1251.7
  Component Side w6: U1.57@2408.35,965.21 2471.21,965.21 2493,987 v1(2698,987) ; R11.2@3538.31,940 v1(3584.93,940)
  Solder Side w6: v1(2698,987) 2720.54,964.46 3450.54,964.46 3475,940 v1(3584.93,940)
CLKOUT: U1.123 U6.32 | length 768.7
  Component Side w6: U6.32@922.64,765.5 1149.5,765.5 1230,846 1230,885 1328.09,983.09 1575.84,983.09 U1.123@1577.65,984.9
D0: U1.133 U6.16 | length 1460.5
  Component Side w6: U6.16@556.5,836.36 556.5,785.5 605,737 605,627.99 765.99,467 1089,467 1187,565 1187,667 1308.05,788.05 U1.133@1577.65,788.05
D1: U1.132 U6.17 | length 1341.2
  Component Side w6: U6.17@627.36,765.5 627.36,637.64 780,485 1079,485 1159.68,565.68 1159.68,678.68 1288.73,807.73 U1.132@1577.65,807.73
D2: U1.131 U6.18 | length 1412.1
  Component Side w6: U6.18@647.05,765.5 647.05,652.95 775,525 v1(1073,525) ; U1.131@1577.65,827.42 1624.58,827.42 1648,804 v1(1673,804)
  Solder Side w6: v1(1073,525) 1352,525 1631,804 v1(1673,804)
D3: U1.127 U6.19 | length 1625.1
  Component Side w6: U6.19@666.73,765.5 666.73,667.27 788,546 1050,546 v1(1073,569) ; U1.127@1575.49,904 U1.127@1577.65,906.16 1641.16,906.16 v1(1730,995)
  Solder Side w6: v1(1073,569) 1364,569 1558,763 1558,823 v1(1730,995)
D4: U1.119 U6.21 | length 1097.4
  Component Side w6: v1(688,854) 706.1,835.9 U6.21@706.1,765.5 ; v1@1463.32,1094.32 1494,1063.64 U1.119@1577.65,1063.64
  Solder Side w6: v1(688,854) 918,854 1014,950 1237,950 1381,1094 v1(1463,1094)
D5: U1.116 U6.22 | length 1316
  Component Side w6: v1(702.79,893.79) 725.79,870.79 U6.22@725.79,765.5 ; U1.116@1577.65,1122.69 v1(1647,1122.69)
  Solder Side w6: v1(702.79,893.79) 729,920 764,920 794,890 875,890 975,990 1203,990 1390,1177 1556,1177 1610.31,1122.69 v1(1647,1122.69)
D6: U1.118 U6.23 | length 1242.2
  Component Side w6: U6.23@745.47,765.5 v1(745.47,894) ; U1.118@1577.65,1083.32 v1(1647,1083.32)
  Solder Side w6: v1(745.47,894) 767.47,872 899,872 997,970 1219,970 1388,1139 1555,1139 1610.68,1083.32 v1(1647,1083.32)
D7: U1.115 U6.24 | length 1056.2
  Component Side w6: U6.24@765.16,765.5 765.16,829.16 786,850 926,850 969,807 1094,807 1160,873 1160,898 1404.38,1142.38 U1.115@1577.65,1142.38
DQ0: U1.62 U5.2 | length 816.2
  Component Side w6: U1.62@2408.35,1063.64 2638.64,1063.64 2683,1108 2683,1332 2737.68,1386.69 U5.2@2959.57,1386.69
DQ1: U1.61 U5.4 | length 887.1
  Component Side w6: U1.61@2408.35,1043.95 2647.95,1043.95 2705,1101 2705,1243.19 v1(2785.5,1323.69) ; U5.4@2959.57,1323.69 v1(3027.91,1323.69)
  Solder Side w6: v1(2785.5,1323.69) v1(3027.91,1323.69)
DQ2: U1.59 U5.5 | length 890.6
  Component Side w6: U1.59@2408.35,1004.58 2458.58,1004.58 2483,1029 2665,1029 2728,1092 2728,1234.7 v1(2785.5,1292.2) ; U5.5@2959.57,1292.2 v1(3027.91,1292.2)
  Solder Side w6: v1(2785.5,1292.2) v1(3027.91,1292.2)
DQ3: U1.58 U5.7 | length 864.6
  Component Side w6: U1.58@2416,984.9 2461.9,984.9 2488,1011 2682,1011 2749,1078 2749,1220 2758.2,1229.2 v1(2782,1229.2) ; U5.7@2959.57,1229.2 v1(3027.91,1229.2)
  Solder Side w6: v1(2782,1229.2) v1(3027.91,1229.2)
DQ4: U1.56 U5.8 | length 904.7
  Component Side w6: U1.56@2408.35,945.53 2409.76,944.12 2477.32,944.12 2498.2,965 2739,965 2768,994 2768,1183.71 v1(2782,1197.71) ; U5.8@2959.57,1197.71 v1(3027.91,1197.71)
  Solder Side w6: v1(2782,1197.71) v1(3027.91,1197.71)
DQ5: U1.47 U5.10 | length 852.3
  Component Side w6: U1.47@2408.35,768.36 2701.36,768.36 2744,811 2744,928 2788,972 2788,1110 2812.72,1134.72 U5.10@2959.57,1134.72
DQ6: U1.139 U5.11 | length 1888.5
  Component Side w6: U1.139@1577.65,669.94 1635.06,669.94 1706,599 v1(1828,599) ; U5.11@2959.57,1103.22 v1(3027.91,1103.22)
  Solder Side w6: v1(1828,599) 2003,599 2047,643 2125,643 2226,744 2226,887 2339,1000 2477,1000 2638,1161 2716,1161 2754,1123 3008.13,1123 v1(3027.91,1103.22)
DQ7: U1.55 U5.13 | length 876
  Component Side w6: v1(2338,954) 2366.16,925.84 U1.55@2408.35,925.84 ; U5.13@2959.57,1040.23 v1(3027.91,1040.23)
  Solder Side w6: v1(2338,954) 2467,954 2553.23,1040.23 v1(3027.91,1040.23)
DQ8: U1.50 U5.42 | length 1477.4
  Component Side w6: v1(2258,749) 2258,789 2306,837 2355,837 2363.27,828.73 2407.04,828.73 U1.50@2408.35,827.42 ; v1(3228,939) 3329.23,1040.23 U5.42@3400.52,1040.23
  Solder Side w6: v1(2258,749) 2710,749 2900,939 v1(3228,939)
DQ9: U1.48 U5.44 | length 1356.1
  Component Side w6: v1(2295,780) 2356,780 2364.05,788.05 U1.48@2408.35,788.05 ; v1(3332.18,1103.22) U5.44@3400.52,1103.22
  Solder Side w6: v1(2295,780) 2385,780 2616,1011 3044,1011 3136.22,1103.22 v1(3332.18,1103.22)
DQ10: U1.75 U5.45 | length 1900
  Component Side w6: U1.75@2298.12,1331.35 2298.12,1381.12 2382,1465 2848,1465 2997,1614 3422,1614 3547,1489 3547,1216 3465.72,1134.72 U5.45@3400.52,1134.72
DQ11: U1.16 U5.47 | length 2073
  Component Side w6: v1(1873,623) 1909,623 1943.79,588.21 U1.16@1943.79,500.65 ; v1(3331.7,1197.91) U5.47@3400.04,1197.91
  Solder Side w6: v1(1873,623) 1989,623 2032,666 2116,666 2194,744 2194,901 2322,1029 2389,1029 2557,1197 2726,1197 2778,1145 3278.79,1145 v1(3331.7,1197.91)
DQ12: U1.17 U5.48 | length 2201.8
  Component Side w6: v1(1873,670) 1919,670 1963.47,625.53 U1.17@1963.47,500.65 ; v1(3332.18,1229.2) U5.48@3400.52,1229.2
  Solder Side w6: v1(1873,670) 2003,670 2027,694 2112,694 2173,755 2173,905 2648,1380 3180,1380 v1@3329,1231
DQ13: U1.74 U5.50 | length 1657.4
  Component Side w6: U1.74@2317.8,1331.35 2317.8,1376.8 2385,1444 2855,1444 3001,1590 3410,1590 3518,1482 3518,1341 3469.2,1292.2 U5.50@3400.52,1292.2
DQ14: U1.66 U5.51 | length 1897.2
  Component Side w6: U1.66@2408.35,1142.38 2407.04,1141.06 2246.94,1141.06 2233,1155 2233,1202 2311,1280 2341,1280 2484,1423 2863,1423 3009,1569 3393,1569 3492,1470 3492,1360 3455.69,1323.69 U5.51@3400.52,1323.69
DQ15: U1.67 U5.53 | length 1707.7
  Component Side w6: U1.67@2408.35,1162.06 2262.94,1162.06 2253,1172 2253,1199 2320,1266 2356,1266 2496,1406 2881,1406 3017,1542 3384,1542 3466,1460 3466,1398 3454.68,1386.69 U5.53@3400.52,1386.69
DQMH: U1.41 U5.39 | length 1293.3
  Component Side w6: v1(2319,665) 2333.75,650.25 U1.41@2408.35,650.25 ; v1(3302,939) 3348,939 3354.74,945.74 U5.39@3400.52,945.74
  Solder Side w6: v1(2319,665) 2351.37,665 2395.37,709 2800,709 2975,884 3247,884 v1(3302,939)
DQML: U1.43 U5.15 | length 1051.5
  Component Side w6: v1(2320,710) 2341.69,688.31 2407.04,688.31 U1.43@2408.35,689.62 ; U5.15@2959.57,977.24 3025,977.24 3048,954.24 v1(3048,909)
  Solder Side w6: v1(2320,710) 2339,729 2726,729 2906,909 v1(3048,909)
EECLK: R14.2 U6.62 U7.2 | length 621.6
  Component Side w6: U7.2@373.22,1545.2 641.8,1545.2 666.73,1520.27 U6.62@666.73,1202.5
EECS: R15.2 U6.63 U7.1 | length 516.7
  Component Side w6: U7.1@373.22,1519.61 520.39,1519.61 539.22,1500.78 539.22,1479.78 608,1411 608,1328 647.05,1288.95 U6.63@647.05,1202.5
EEDATA: R16.2 R17.1 U6.61 U7.4 | length 694.9
  Component Side w6: U7.4@373.22,1596.18 489.83,1596.18 494.87,1591.14 R17.1@494.87,1570.8 654.55,1570.8 698,1527.35 698,1268 686.42,1256.42 U6.61@686.42,1202.5
EXTRA: U6.34
FPGA_CLOCK: U1.51 U2.3 | length 335.9
  Component Side w10: U1.51@2408.35,847.1 2455.9,847.1 2508,795 2654,795 2694.09,835.09 U2.3@2694.09,847.1
FPGA_DONE: LED3.1 R7.2 U1.71 | length 274.8
  Component Side w6: U1.71@2408.35,1241 2636,1241 2650,1227 LED3.1@2650,1199.65
FPGA_PROGRAM: C74.2 R9.2 S3.1 U1.37 U6.43 | length 5205.2
  Component Side w6: v1(552,699) 435,582 435,88 474,49 2974,49 3000,75 3000,229 3048,277 C74.2@3070,277 ; v1(910,1020) 923.21,1033.21 U6.43@993.5,1033.21 ; U1.37@2408.35,571.51 2464.49,571.51 2472,564 R9.2@2504.35,564 v1(2504.35,384) ; v1(3070,384) C74.2@3070,277 ; S3.1@3193.78,277 C74.2@3070,277
  Solder Side w6: v1(552,699) 659,806 659,899 780,1020 v1(910,1020) ; v1(2504.35,384) v1(3070,384)